# EAGLE board schematPCB (EAGLE 8.7.0)
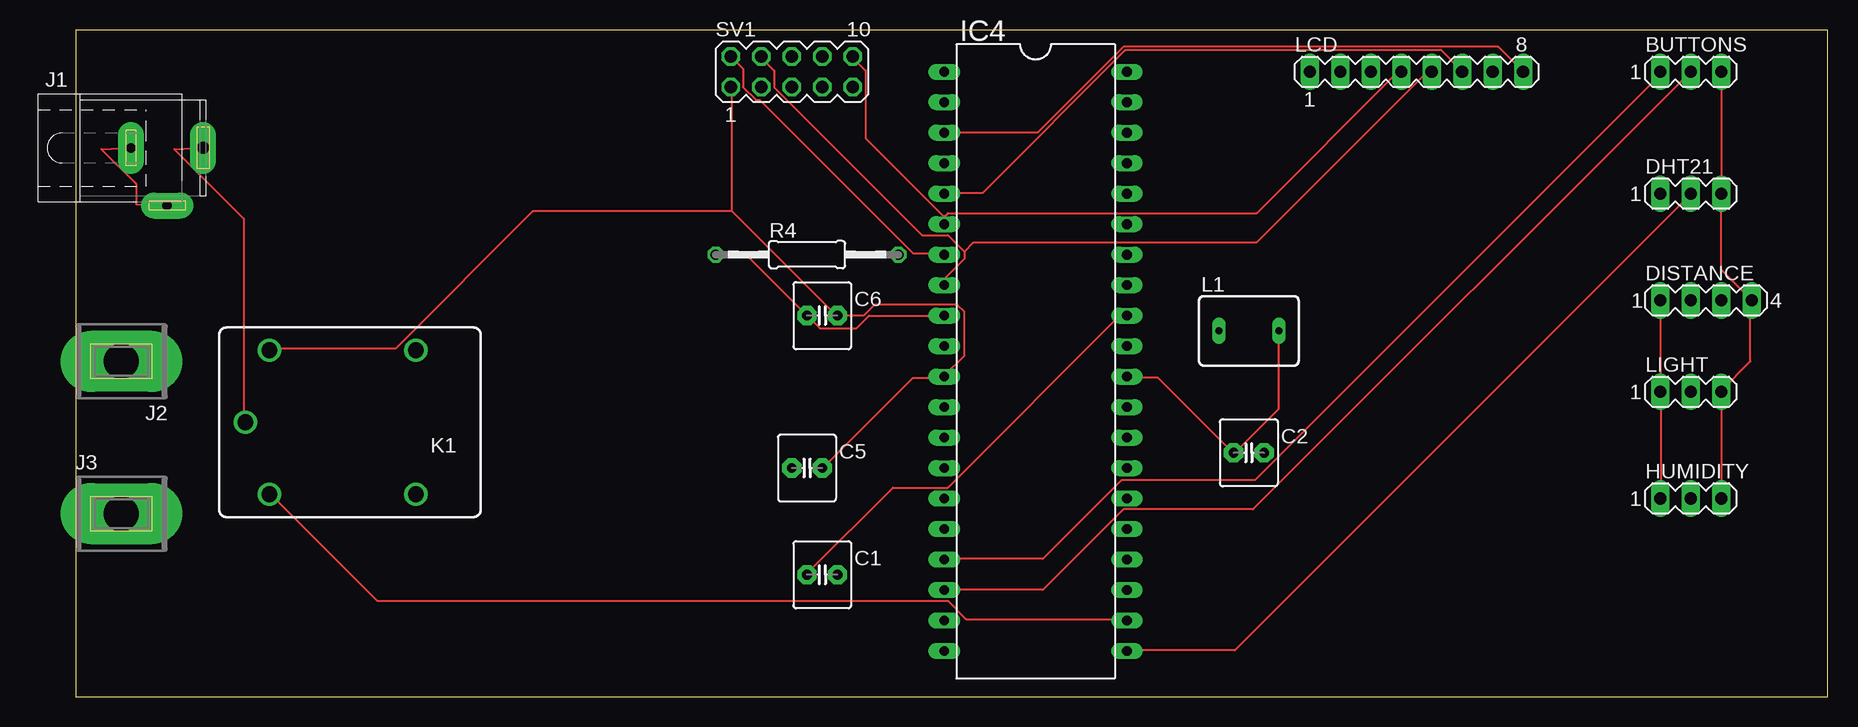
[diagram p0: board, top side]
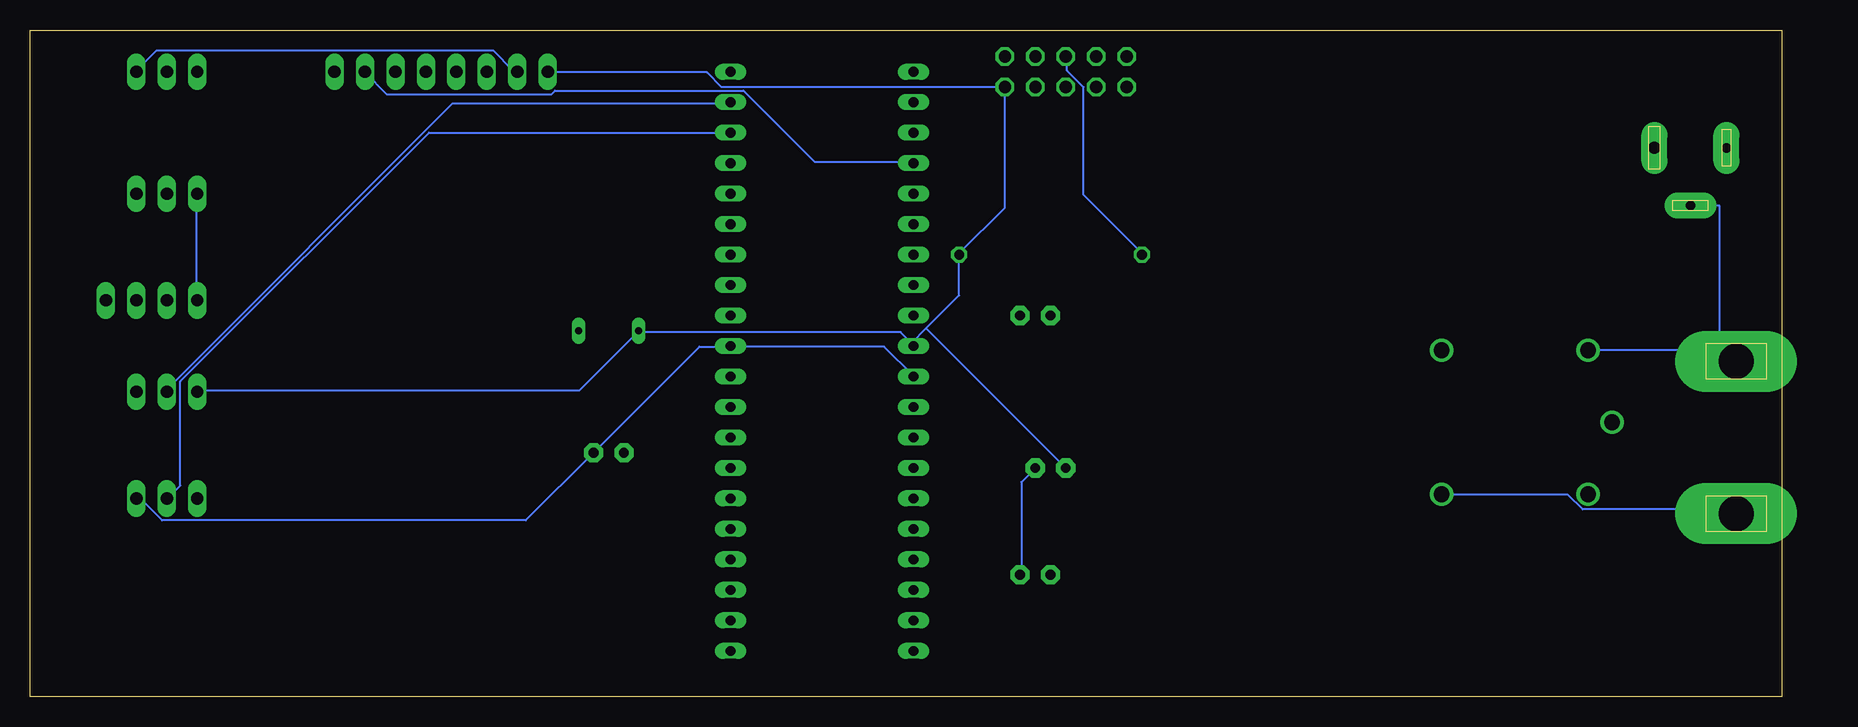
[diagram p1: board, bottom side, seen from below]

Size 146.03 x 55.55 mm. Coordinates in mm from the lower left corner, seen from the top.
Outline: 0,0 146.03,0 146.03,55.55 0,55.55 0,0
Copper layers (1*16): Top 0.035mm / dielectric 1.5mm / Bottom 0.035mm
Design rules "default": minimum track width 6mil, minimum drill 0.35mm, track to track 6mil, track to pad 6mil, pad to pad 6mil, via to via 6mil, smd to smd 6mil, copper to edge 40mil, drill to drill 6mil, minimum pad ring 10mil, minimum via ring 8mil, stop-mask expansion 4mil, vias tented up to drill 0mil, thermal gap 10mil

## Footprints (pad centres in the part's own frame; a part is rotated, then mirrored left to right if it is on the bottom)
MA03-1 = drill 1.016 long: 1 -2.54,0; 2 0,0; 3 2.54,0
C2.5-6 = drill 0.813 pad 1.6 octagon: 1 -1.27,0; 2 1.27,0
MA04-1 = drill 1.016 long: 1 -3.81,0; 2 -1.27,0; 3 1.27,0; 4 3.81,0
DIL40 = drill 0.813 long: 1 -24.13,-7.62; 2 -21.59,-7.62; 3 -19.05,-7.62; 4 -16.51,-7.62; 5 -13.97,-7.62; 6 -11.43,-7.62; 7 -8.89,-7.62; 8 -6.35,-7.62; 9 -3.81,-7.62; 10 -1.27,-7.62; 11 1.27,-7.62; 12 3.81,-7.62; 13 6.35,-7.62; 14 8.89,-7.62; 15 11.43,-7.62; 16 13.97,-7.62; 17 16.51,-7.62; 18 19.05,-7.62; 19 21.59,-7.62; 20 24.13,-7.62; 21 24.13,7.62; 22 21.59,7.62; 23 19.05,7.62; 24 16.51,7.62; 25 13.97,7.62; 26 11.43,7.62; 27 8.89,7.62; 28 6.35,7.62; 29 3.81,7.62; 30 1.27,7.62; 31 -1.27,7.62; 32 -3.81,7.62; 33 -6.35,7.62; 34 -8.89,7.62; 35 -11.43,7.62; 36 -13.97,7.62; 37 -16.51,7.62; 38 -19.05,7.62; 39 -21.59,7.62; 40 -24.13,7.62
SPC4078 = drill 0.8 pad 2.184 long: 1 -3,0; 2 0,-4.8 | drill 1 pad 2.184 long: 3 3,0
62221 = drill 2.921 pad 5.08 long: 1 0,0
JS-M = drill 1.3: 1 6.7,6; 2 6.7,-6; C 8.7,0; NC -5.5,-6; NO -5.5,6
BS75 = drill 0.6 long: 1 -2.5,0; 2 2.5,0
MA08-1 = drill 1.016 long: 1 -8.89,0; 2 -6.35,0; 3 -3.81,0; 4 -1.27,0; 5 1.27,0; 6 3.81,0; 7 6.35,0; 8 8.89,0
0207/15 = drill 0.813 octagon: 1 -7.62,0; 2 7.62,0
MA05-2 = drill 1.016 octagon: 1 -5.08,-1.27; 2 -5.08,1.27; 3 -2.54,-1.27; 4 -2.54,1.27; 5 0,-1.27; 6 0,1.27; 7 2.54,-1.27; 8 2.54,1.27; 9 5.08,-1.27; 10 5.08,1.27

## Placement (x,y rotation side)
BUTTONS  [MA03-1]  134.62,52.07 0 top
C1  100nF  [C2.5-6]  62.23,10.16 0 top
C2  100nF  [C2.5-6]  97.79,20.32 0 top
C5  100nF  [C2.5-6]  60.96,19.05 0 top
C6  100nF  [C2.5-6]  62.23,31.75 0 top
DHT21  [MA03-1]  134.62,41.91 0 top
DISTANCE  [MA04-1]  135.89,33.02 0 top
HUMIDITY  [MA03-1]  134.62,16.51 0 top
IC4  MEGA32-P  [DIL40]  80.01,27.94 270 top
J1  12v  [SPC4078]  7.62,45.72 0 top
J2  PIN1-2  [62221]  3.81,27.94 180 top
J3  PIN1-2  [62221]  3.81,15.24 0 top
K1  JS-M1-9V-4  [JS-M]  22.86,22.86 180 top
L1  100uH  [BS75]  97.79,30.48 0 top
LCD  [MA08-1]  111.76,52.07 0 top
LIGHT  [MA03-1]  134.62,25.4 0 top
R4  1k  [0207/15]  60.96,36.83 0 top
SV1  [MA05-2]  59.69,52.07 0 top

## Library data of the parts
BUTTONS DHT21 DISTANCE HUMIDITY LCD LIGHT SV1 = con-lstb; OC_FARNELL: unknown; OC_NEWARK: unknown
C1 C2 C5 C6 = capacitor-wima
IC4 = atmel; MPN: ATMEGA32-16PU; OC_FARNELL: 1661729; OC_NEWARK: 51P1794
J1 = con-jack; OC_FARNELL: unknown; OC_NEWARK: unknown
J2 J3 = con-faston; MF: TYCO ELECTRONICS; MPN: 62221-1; OC_FARNELL: unknown; OC_NEWARK: 16H2318
K1 = relay; OC_FARNELL: unknown; OC_NEWARK: unknown
L1 = inductor-neosid; OC_FARNELL: unknown; OC_NEWARK: unknown
R4 = rcl; SPICEPREFIX: R

## Nets
BUTTON1: BUTTONS.2 IC4.18
BUTTON2: BUTTONS.1 IC4.17
ECHO: DISTANCE.3
GND: BUTTONS.3 C1.2 C2.2 C5.2 C6.2 DHT21.3 DISTANCE.4 HUMIDITY.3 IC4.11 IC4.31 J1.1 J1.2 J2.1 K1.2 LCD.2 LIGHT.3 SV1.1
N$1: IC4.39 LIGHT.2
N$2: C6.1 IC4.9 R4.1 SV1.6
N$3: IC4.6 LCD.4 SV1.10
N$4: C1.1 IC4.32
N$5: C2.1 IC4.30 L1.2
N$6: IC4.8 LCD.5 SV1.4
N$7: IC4.5 LCD.6
N$8: IC4.4 LCD.7
N$9: IC4.3 LCD.8
N$10: DHT21.2 IC4.21
N$11: J3.1 K1.NO
N$12: HUMIDITY.2 IC4.38
N$13: IC4.22 K1.1
N$20: IC4.7 SV1.2
POVER_CONVERTER: J1.3 K1.C
TRIG: DISTANCE.2
VCC: C5.1 DHT21.1 DISTANCE.1 HUMIDITY.1 IC4.10 L1.1 LCD.1 LIGHT.1 R4.2 SV1.9

## Tracks (layer width: path | path; a pad name or v marks a point on that pad's centre or on a via)
BUTTON1
  Top 0.152: IC4.18 80.62,8.89 87.33,15.6 98.15,15.6 BUTTONS.2
BUTTON2
  Top 0.152: IC4.17 72.39,11.48 80.62,11.48 87.17,18.03 98.3,18.03 131.98,51.71 131.98,52.02 BUTTONS.1
GND
  Top 0.152: HUMIDITY.3 LIGHT.3 137.16,25.5 139.6,27.94 139.6,32.97 DISTANCE.4 137.16,35.56 DHT21.3 BUTTONS.3 | J1.2 5.03,41.05 5.03,42.72 2.13,45.62 J1.1 | 54.71,40.44 54.71,50.8 SV1.1 | 54.71,40.44 63.4,31.75 C6.2 65.68,31.75 66.6,32.66 73.46,32.66 74.07,32.05 74.07,28.4 72.39,26.72 IC4.11 72.39,26.57 69.8,26.57 62.33,19.1 C5.2 | 54.71,40.44 38.1,40.44 26.67,29.01 16.31,29.01 K1.2
  Bottom 0.152: LCD.2 105.46,52.17 105.77,52.17 107.44,53.85 135.48,53.85 137.16,52.17 BUTTONS.3 | 5.18,28.85 2.29,28.85 1.37,27.94 J2.1 5.18,28.85 | 5.18,28.85 K1.2 | 5.18,28.85 5.18,40.89 J1.2 | 87.63,29.16 90.22,29.16 C2.2 104.7,14.68 135.03,14.68 136.85,16.51 HUMIDITY.3 | C5.2 63.4,17.88 63.4,10.26 C1.2 | 87.63,29.16 74.83,29.16 72.39,26.72 IC4.11 | 87.63,29.16 IC4.31
N$1
  Bottom 0.152: IC4.39 87.63,49.43 110.8,49.43 134.72,25.5 LIGHT.2
N$2
  Top 0.152: IC4.9 66.14,31.75 65.08,30.68 62.03,30.68 C6.1 55.93,36.78 53.34,36.78 R4.1
  Bottom 0.152: SV1.6 59.59,53.24 59.59,52.17 58.22,50.8 58.22,41.81 53.34,36.93 R4.1
N$3
  Top 0.152: 72.39,39.98 65.84,46.53 65.84,52.17 64.77,53.24 SV1.10 | 72.39,39.98 72.69,40.28 98.45,40.28 110.19,52.02 110.49,52.02 LCD.4 | 72.39,39.98 IC4.6
N$4
  Top 0.152: IC4.32 87.02,31.75 72.69,17.42 68.12,17.42 60.96,10.26 C1.1
N$5
  Top 0.152: L1.2 100.28,30.38 100.28,23.98 96.62,20.32 C2.1 96.47,20.32 90.22,26.57 87.63,26.57 IC4.30
N$6
  Top 0.152: IC4.8 72.39,34.8 74.07,36.47 74.07,37.08 | 74.07,37.08 72.69,38.46 70.56,38.46 58.22,50.8 58.22,52.17 57.15,53.24 SV1.4 | 74.07,37.08 74.83,37.85 98.45,37.85 112.62,52.02 112.93,52.02 LCD.5
N$7
  Top 0.152: IC4.5 72.39,41.96 75.59,41.96 87.48,53.85 113.84,53.85 115.52,52.17 LCD.6
N$8
  Bottom 0.152: IC4.4 72.39,44.55 80.62,44.55 86.56,50.49 102.26,50.49 102.56,50.19 116.28,50.19 118.11,52.02 LCD.7
N$9
  Top 0.152: IC4.3 80.16,46.99 87.33,54.15 118.57,54.15 LCD.8
N$10
  Top 0.152: IC4.21 87.63,3.86 96.62,3.86 134.57,41.81 DHT21.2
N$11
  Bottom 0.152: K1.NO 28.35,16.81 17.83,16.81 16.61,15.6 2.29,15.6 1.37,16.51 J3.1
N$12
  Bottom 0.152: IC4.38 112.78,46.99 133.5,26.26 133.5,17.58 134.57,16.51 HUMIDITY.2
N$13
  Top 0.152: IC4.22 87.63,6.45 74.22,6.45 72.69,7.98 25.15,7.98 16.31,16.81 K1.1
N$20
  Top 0.152: SV1.2 55.63,52.32 55.63,50.8 56.69,49.73 57,49.73 69.8,36.93 72.39,36.93 IC4.7
POVER_CONVERTER
  Top 0.152: K1.C 14.02,22.91 14.02,39.83 8.23,45.62 J1.3
VCC
  Top 0.152: HUMIDITY.1 132.13,16.51 132.13,25.35 LIGHT.1 132.13,25.5 132.13,32.97 DISTANCE.1
  Bottom 0.152: DHT21.1 132.13,41.81 132.13,33.12 DISTANCE.1 | 72.54,29.46 72.39,29.31 IC4.10 72.54,29.46 | 72.54,29.46 73.46,30.38 95.25,30.38 L1.1 95.4,30.38 100.28,25.5 131.98,25.5 LIGHT.1 | 72.54,29.46 71.32,30.68 | 71.32,30.68 68.58,33.43 R4.2 68.58,36.93 64.77,40.74 SV1.9 88.39,50.8 89.61,52.02 102.87,52.02 LCD.1 | 71.32,30.68 C5.1